# EAGLE board sensor_distancia (EAGLE 9.6.2)
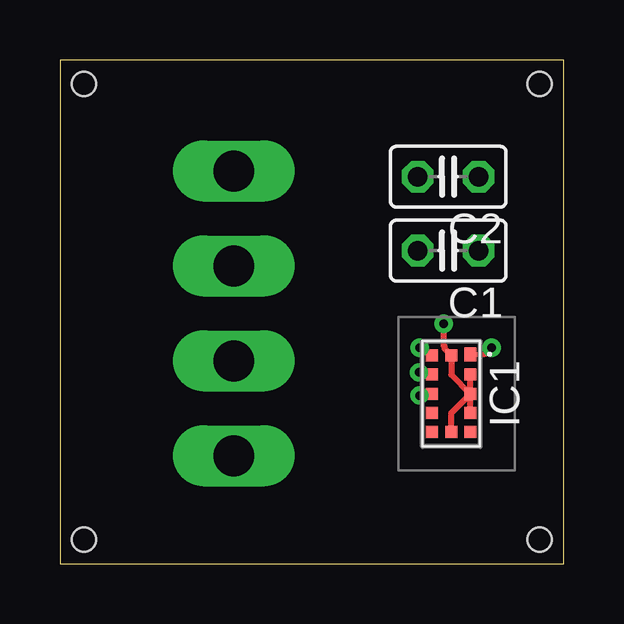
[diagram p0: board, top side]
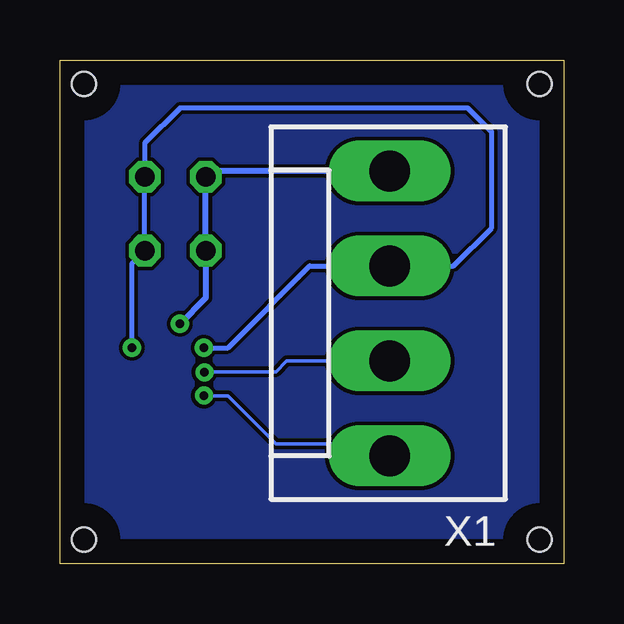
[diagram p1: board, bottom side, seen from below]

Size 21 x 21 mm. Coordinates in mm from the lower left corner, seen from the top.
Outline: 0,0 21,0 21,21 0,21 0,0
Copper layers (1*16): Top 0.035mm / dielectric 1.5mm / Bottom 0.035mm
Design rules "default": minimum track width 6mil, minimum drill 0.35mm, track to track 6mil, track to pad 6mil, pad to pad 6mil, via to via 6mil, smd to smd 6mil, copper to edge 40mil, drill to drill 6mil, minimum pad ring 10mil, minimum via ring 8mil, stop-mask expansion 4mil, vias tented up to drill 0mil, thermal gap 10mil
Holes 1 mm at 1,20 20,20 20,1 1,1

## Footprints (pad centres in the part's own frame; a part is rotated, then mirrored left to right if it is on the bottom)
C025-025X050 = drill 0.813 octagon: 1 -1.27,0; 2 1.27,0
VL53L0X = smd 0.58 x 0.5: 1 1.64,-0.575 | smd 0.5 x 0.5: 2 0.8,-0.575; 3 0,-0.575; 4 -0.8,-0.575; 5 -1.6,-0.575; 6 -1.6,0.225; 7 -1.6,1.025; 8 -0.8,1.025; 9 0,1.025; 10 0.8,1.025; 11 1.6,1.025; 12 1.6,0.225
KK-156-4 = drill 1.7 pad 2.184 long: 1 -5.94,0; 2 -1.98,0; 3 1.98,0; 4 5.94,0

## Placement (x,y rotation side)
C1  [C025-025X050]  16.19,13.05 180 top
C2  [C025-025X050]  16.19,16.13 180 top
IC1  VL53L0X  [VL53L0X]  16.54,7.08 90 top
X1  [KK-156-4]  7.25,10.43 90 bottom

## Library data of the parts
C1 C2 = rcl; SPICEPREFIX: C
IC1 = VL53L0X; DESCRIPTION: World smallest Time-of-Flight ranging and gesture detection sensor; HEIGHT: 1mm; MANUFACTURER_NAME: STMicroelectronics; MANUFACTURER_PART_NUMBER: VL53L0X
X1 = con-molex; MF: MOLEX; OC_FARNELL: unknown; OC_NEWARK: unknown

## Nets
+5V: C1.1 C2.1 IC1.1 IC1.11 X1.3
AGND: C1.2 C2.2 IC1.2 IC1.3 IC1.4 IC1.6 IC1.12 X1.4
N$1: IC1.10 X1.2
N$2: IC1.9 X1.1

## Tracks (layer width: path | path; a pad name or v marks a point on that pad's centre or on a via)
+5V  (via drill 0.35 pad 0.55)
  Top 0.203: 17,8.84 IC1.1 17.72,8.72 v18,9 | IC1.11 15.2,9 v15,9
  Bottom 0.203: v18,9 18,12.51 C1.1 C2.1 17.46,17.54 16,19 4,19 3,18 3,14 4.59,12.41 X1.3 10.59,12.41 14,9 v15,9
AGND  (via drill 0.35 pad 0.55)
  Top 0.254: IC1.3 IC1.2 | IC1.4 IC1.3 | IC1.6 16.32,6.28 IC1.3 | IC1.3 16.32,7.88 IC1.12 16.04,8.95 16.04,9.05 16,9.09 v16,10
  Bottom 0.254: v16,10 14.92,11.08 C1.2 C2.2 14.68,16.37 X1.4
GND
  pour Bottom: 0,21 21,21 21,0 0,0
N$1  (via drill 0.35 pad 0.55)
  Top 0.152: v14.97,7.97 15.42,7.97
  Top 0.305: 15.42,7.97 IC1.10
  Bottom 0.152: X1.2 11.55,8.45 12,8 15,8 v14.97,7.97
N$2  (via drill 0.35 pad 0.55)
  Top 0.152: v14.99,7.01 15.44,7.01 IC1.9
  Bottom 0.152: X1.1 7.76,5 12,5 14,7 v15,7 v14.99,7.01